# Altium PCB Slave.PcbDoc (part 2 of 2)
Units mm, origin at the board's own origin, x right, y up, seen from the top; angles counter-clockwise.
Board outline 380 x 63 mm, 4 copper layers (Top Copper, Signal Layer 1, Signal Layer 2, Bottom Copper), stack 1.57 mm thick; 247 components, 208 nets, 792 pads, 0 vias.
Unrouted connection lines stored in the file: 502.
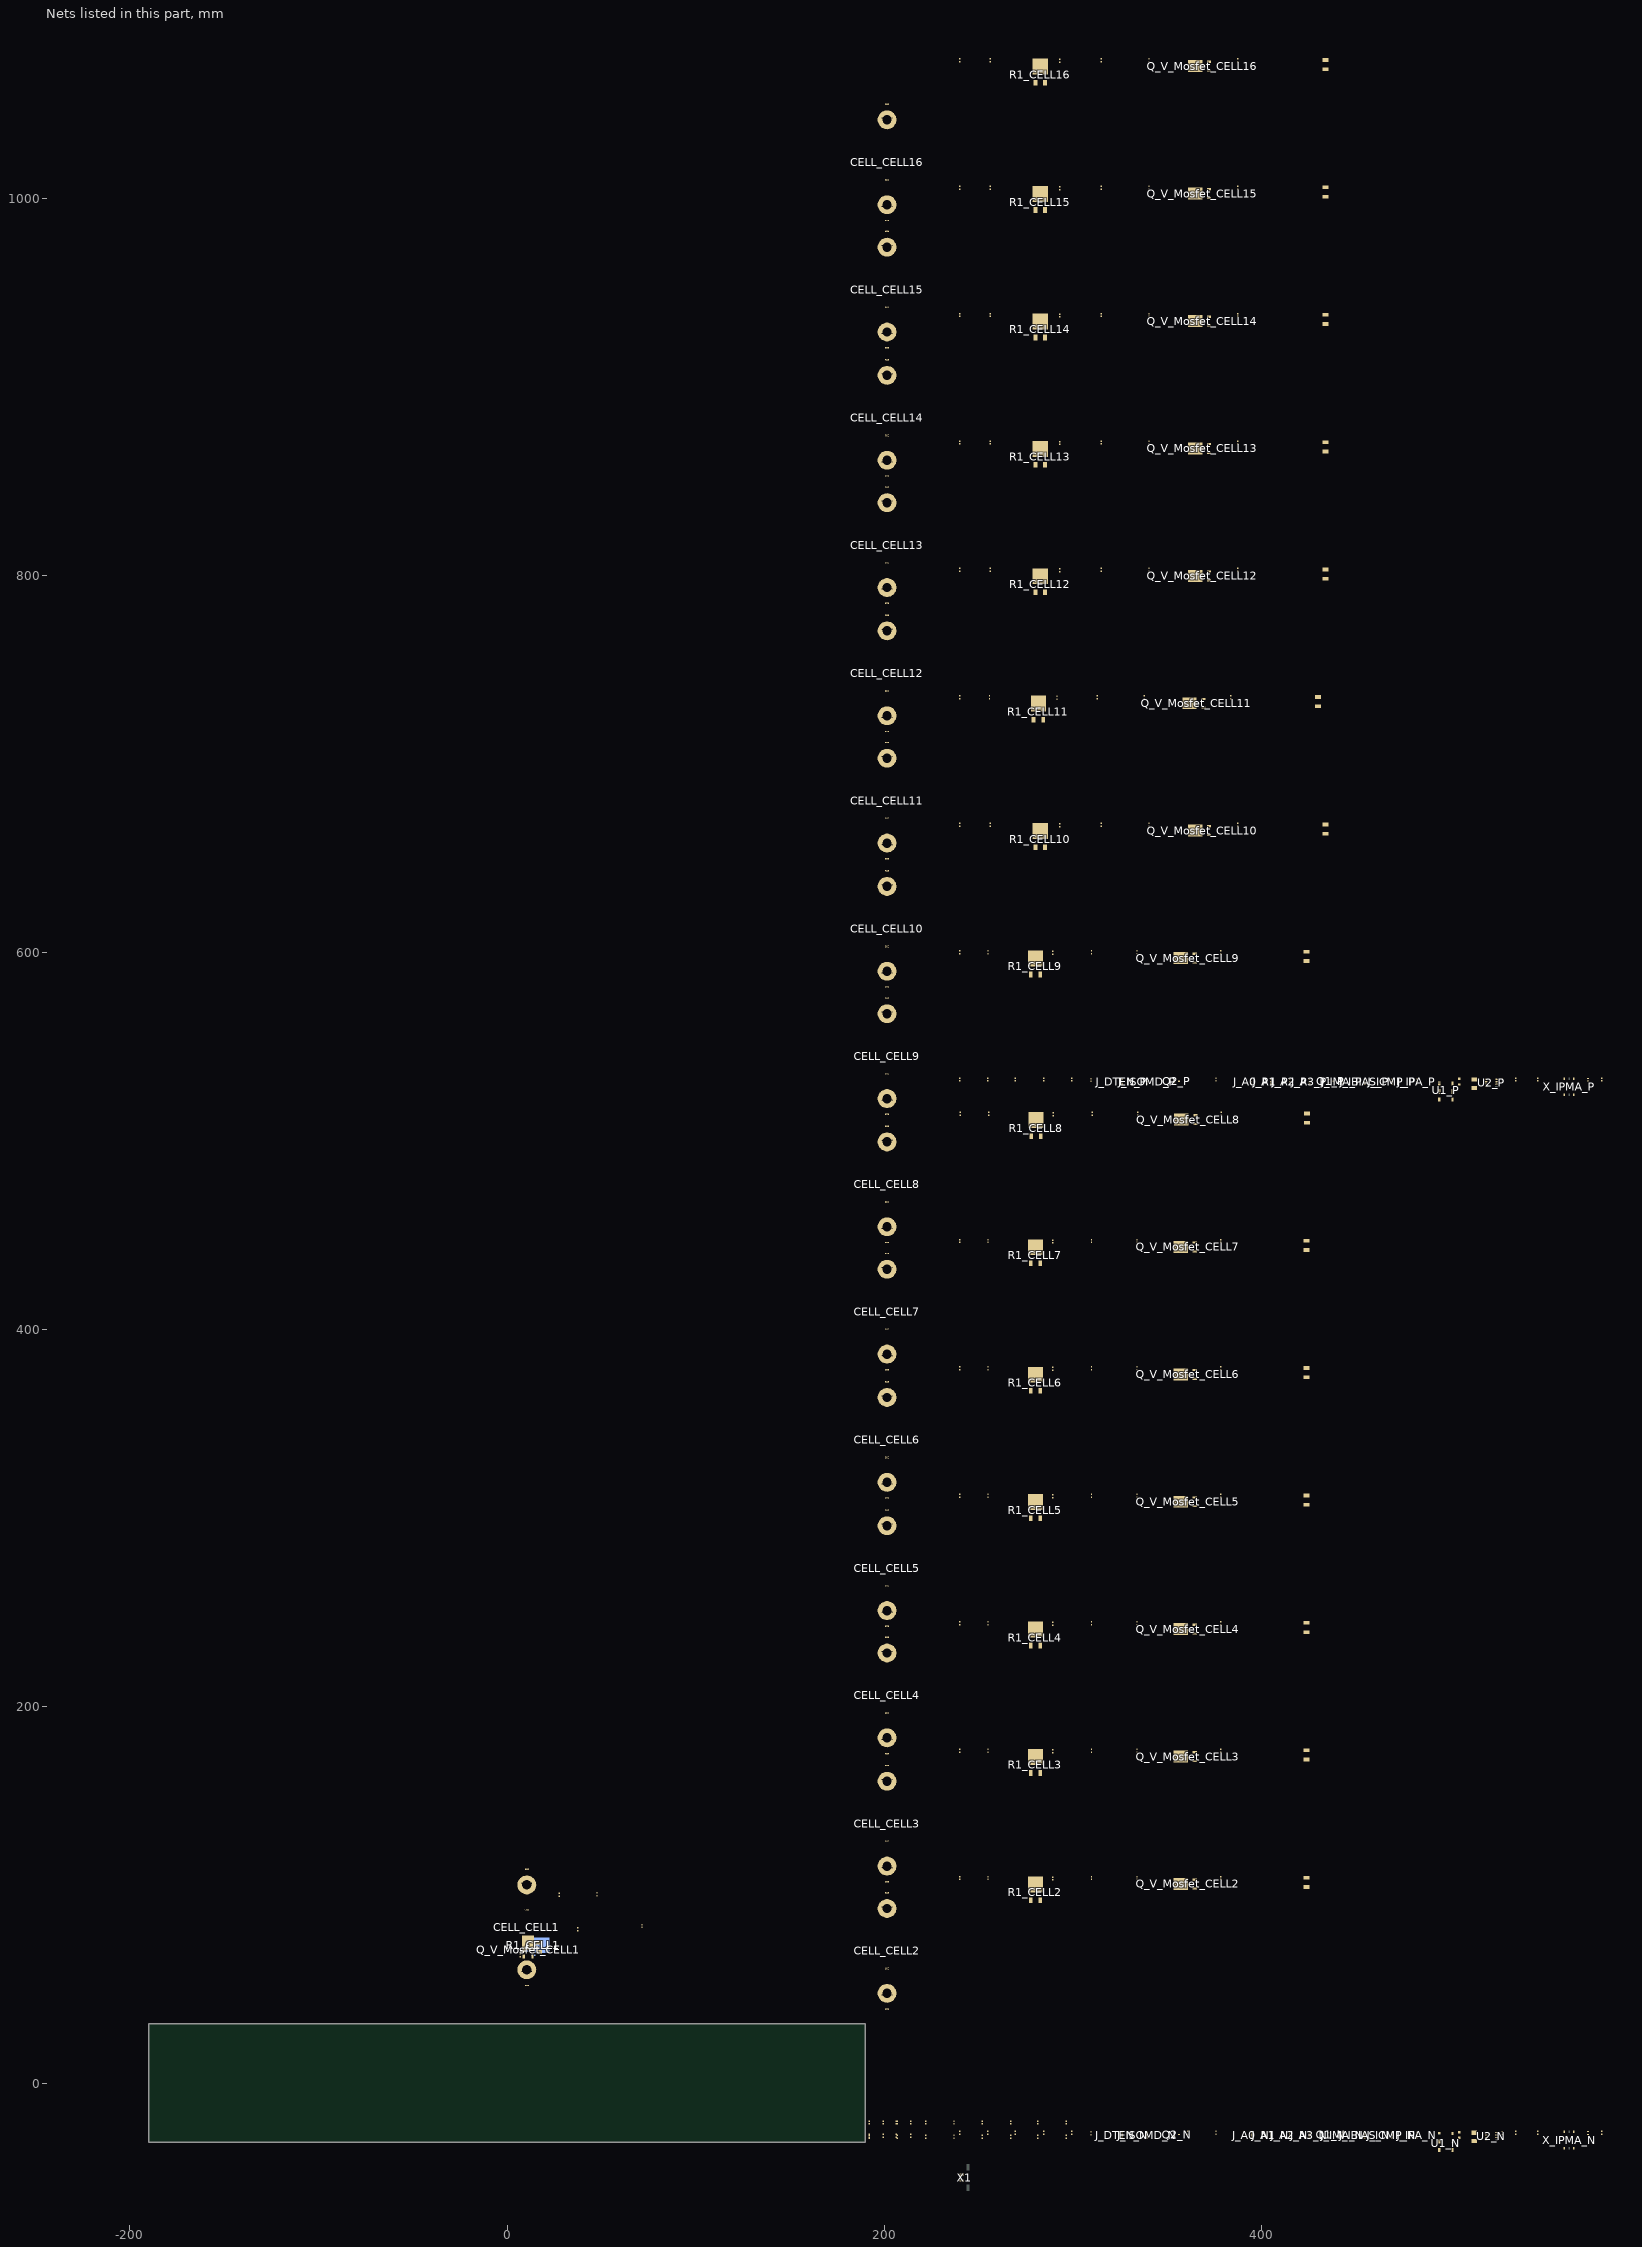
[diagram p2: the nets of this part, all layers, seen from the top]

## Part data
C_IPMA_N C_IPMA_P C_Temp1_N C_Temp1_P C_Temp2_N C_Temp2_P C_Temp3_N C_Temp3_P C_Temp4_N C_Temp4_P C_V1_N C_V1_P C_V_CELL1 C_V_CELL2 C_V_CELL3 C_V_CELL4 C_V_CELL5 C_V_CELL6 C_V_CELL7 C_V_CELL8 C_V_CELL9 C_V_CELL10 C_V_CELL11 C_V_CELL12 C_V_CELL13 C_V_CELL14 C_V_CELL15 C_V_CELL16 C_VREF1_N C_VREF1_P C_VREF2_N C_VREF2_P C_VREG1_N C_VREG1_P C_VREG2_N C_VREG2_P: library part CAP-0603, "CAP-0603"
CELL_CELL1 CELL_CELL2 CELL_CELL3 CELL_CELL4 CELL_CELL5 CELL_CELL6 CELL_CELL7 CELL_CELL8 CELL_CELL9 CELL_CELL10 CELL_CELL11 CELL_CELL12 CELL_CELL13 CELL_CELL14 CELL_CELL15 CELL_CELL16: library part Li1x7pVTC6T_Clip
D2_N D2_P: library part DIODE-SMB
F_V_CELL1 F_V_CELL2 F_V_CELL3 F_V_CELL4 F_V_CELL5 F_V_CELL6 F_V_CELL7 F_V_CELL8 F_V_CELL9 F_V_CELL10 F_V_CELL11 F_V_CELL12 F_V_CELL13 F_V_CELL14 F_V_CELL15 F_V_CELL16: library part 0679L, "0679L"
J_A0_N J_A0_P J_A1_N J_A1_P J_A2_N J_A2_P J_A3_N J_A3_P J_DTEN_N J_DTEN_P J_IBIAS_N J_IBIAS_P J_ICMP_N J_ICMP_P J_IMA_N J_IMA_P J_IPA_N J_IPA_P J_ISOMD_N J_ISOMD_P: library part "DPDT Solder"
LED_DEBUG_N LED_DEBUG_P LED_V_D_CELL1 LED_V_D_CELL2 LED_V_D_CELL3 LED_V_D_CELL4 LED_V_D_CELL5 LED_V_D_CELL6 LED_V_D_CELL7 LED_V_D_CELL8 LED_V_D_CELL9 LED_V_D_CELL10 LED_V_D_CELL11 LED_V_D_CELL12 LED_V_D_CELL13 LED_V_D_CELL14 LED_V_D_CELL15 LED_V_D_CELL16: library part LED-0603, "LED-0603"
NTC_Gate_CELL1 NTC_Gate_CELL2 NTC_Gate_CELL3 NTC_Gate_CELL4 NTC_Gate_CELL5 NTC_Gate_CELL6 NTC_Gate_CELL7 NTC_Gate_CELL8 NTC_Gate_CELL9 NTC_Gate_CELL10 NTC_Gate_CELL11 NTC_Gate_CELL12 NTC_Gate_CELL13 NTC_Gate_CELL14 NTC_Gate_CELL15 NTC_Gate_CELL16: library part NTC-0603, "NTC-0603"
Q_V_Mosfet_CELL1 Q_V_Mosfet_CELL2 Q_V_Mosfet_CELL3 Q_V_Mosfet_CELL4 Q_V_Mosfet_CELL5 Q_V_Mosfet_CELL6 Q_V_Mosfet_CELL7 Q_V_Mosfet_CELL8 Q_V_Mosfet_CELL9 Q_V_Mosfet_CELL10 Q_V_Mosfet_CELL11 Q_V_Mosfet_CELL12 Q_V_Mosfet_CELL13 Q_V_Mosfet_CELL14 Q_V_Mosfet_CELL15 Q_V_Mosfet_CELL16: library part DMP10H400SK3-13, "DMP10H400SK3-13", Package=TO252, DeviceSetName=DMP10H400SK3-13, GateName_1=G$1, LibraryName=IFE_Transistors, SymbolName_1=LABELED-PMOS
R1_CELL1 R1_CELL2 R1_CELL3 R1_CELL4 R1_CELL5 R1_CELL6 R1_CELL7 R1_CELL8 R1_CELL9 R1_CELL10 R1_CELL11 R1_CELL12 R1_CELL13 R1_CELL14 R1_CELL15 R1_CELL16: library part RES_TO252, "RES SMD TO252", Package=TO252, Company=IFE, Part=RES_TO252
R2_N R2_P R3_N R3_P: library part RES_0603, "RES SMD 0603", Package=0603, Company=IFE, Part=RES_0603
R4_N R4_P R5_N R5_P R6_N R6_P R7_N R7_P R_DEBUG_N R_DEBUG_P R_Gate_CELL1 R_Gate_CELL2 R_Gate_CELL3 R_Gate_CELL4 R_Gate_CELL5 R_Gate_CELL6 R_Gate_CELL7 R_Gate_CELL8 R_Gate_CELL9 R_Gate_CELL10 R_Gate_CELL11 R_Gate_CELL12 R_Gate_CELL13 R_Gate_CELL14 R_Gate_CELL15 R_Gate_CELL16 R_IMA_N R_IMA_P R_Input1_N R_Input1_P R_Input_CELL1 R_Input_CELL2 R_Input_CELL3 R_Input_CELL4 R_Input_CELL5 R_Input_CELL6 R_Input_CELL7 R_Input_CELL8 R_Input_CELL9 R_Input_CELL10 R_Input_CELL11 R_Input_CELL12 R_Input_CELL13 R_Input_CELL14 R_Input_CELL15 R_Input_CELL16 R_IPA_N R_IPA_P R_Temp1_N R_Temp1_P R_Temp2_N R_Temp2_P R_Temp3_N R_Temp3_P R_Temp4_N R_Temp4_P R_V_D_LED_CELL1 R_V_D_LED_CELL2 R_V_D_LED_CELL3 R_V_D_LED_CELL4 R_V_D_LED_CELL5 R_V_D_LED_CELL6 R_V_D_LED_CELL7 R_V_D_LED_CELL8 R_V_D_LED_CELL9 R_V_D_LED_CELL10 R_V_D_LED_CELL11 R_V_D_LED_CELL12 R_V_D_LED_CELL13 R_V_D_LED_CELL14 R_V_D_LED_CELL15 R_V_D_LED_CELL16 R_VREGPU_N R_VREGPU_P: library part RES-0603
X1: library part POS2_MF43650-0224, Package=43650-0224, DeviceName=43650-0224, DeviceSetName=HEADER_POS2_?, GateName_1=G$1, LibraryName="MOLEX Micro-Fit", SymbolName_1=HEADER_POS2

## Nets (pads, with @x,y where several pads share a name; then routed paths per layer and width w, separated by ;. In a path a pad name is that pad's centre, name@x,y a point inside that pad or via, vN(x,y) a via of type N, cw(c..) or ccw(c..) an arc to the next point about the centre after c; other vN are vias at no path point)
CSB_N: J_IMA_N.1
CSB_P: J_IMA_P.1
DRIVE_N: Q1_N.1 U1_N.38
DRIVE_P: Q1_P.1 U1_P.38
F_CELL1: C_V_CELL1.2 F_V_CELL1.1 NTC_Gate_CELL1.2 Q_V_Mosfet_CELL1.3 R1_CELL1.3 R_Input_CELL1.1
F_CELL2: C_V_CELL2.2 F_V_CELL2.1 NTC_Gate_CELL2.2 Q_V_Mosfet_CELL2.3 R1_CELL2.3 R_Input_CELL2.1
F_CELL3: C_V_CELL3.2 F_V_CELL3.1 NTC_Gate_CELL3.2 Q_V_Mosfet_CELL3.3 R1_CELL3.3 R_Input_CELL3.1
F_CELL4: C_V_CELL4.2 F_V_CELL4.1 NTC_Gate_CELL4.2 Q_V_Mosfet_CELL4.3 R1_CELL4.3 R_Input_CELL4.1
F_CELL5: C_V_CELL5.2 F_V_CELL5.1 NTC_Gate_CELL5.2 Q_V_Mosfet_CELL5.3 R1_CELL5.3 R_Input_CELL5.1
F_CELL6: C_V_CELL6.2 F_V_CELL6.1 NTC_Gate_CELL6.2 Q_V_Mosfet_CELL6.3 R1_CELL6.3 R_Input_CELL6.1
F_CELL7: C_V_CELL7.2 F_V_CELL7.1 NTC_Gate_CELL7.2 Q_V_Mosfet_CELL7.3 R1_CELL7.3 R_Input_CELL7.1
F_CELL8: C_V_CELL8.2 F_V_CELL8.1 NTC_Gate_CELL8.2 Q_V_Mosfet_CELL8.3 R1_CELL8.3 R_Input_CELL8.1
F_CELL9: C_V_CELL9.2 F_V_CELL9.1 NTC_Gate_CELL9.2 Q_V_Mosfet_CELL9.3 R1_CELL9.3 R_Input_CELL9.1
F_CELL10: C_V_CELL10.2 F_V_CELL10.1 NTC_Gate_CELL10.2 Q_V_Mosfet_CELL10.3 R1_CELL10.3 R_Input_CELL10.1
F_CELL11: C_V_CELL11.2 F_V_CELL11.1 NTC_Gate_CELL11.2 Q_V_Mosfet_CELL11.3 R1_CELL11.3 R_Input_CELL11.1
F_CELL12: C_V_CELL12.2 F_V_CELL12.1 NTC_Gate_CELL12.2 Q_V_Mosfet_CELL12.3 R1_CELL12.3 R_Input_CELL12.1
F_CELL13: C_V_CELL13.2 F_V_CELL13.1 NTC_Gate_CELL13.2 Q_V_Mosfet_CELL13.3 R1_CELL13.3 R_Input_CELL13.1
F_CELL14: C_V_CELL14.2 F_V_CELL14.1 NTC_Gate_CELL14.2 Q_V_Mosfet_CELL14.3 R1_CELL14.3 R_Input_CELL14.1
F_CELL15: C_V_CELL15.2 F_V_CELL15.1 NTC_Gate_CELL15.2 Q_V_Mosfet_CELL15.3 R1_CELL15.3 R_Input_CELL15.1
F_CELL16: C_V_CELL16.2 F_V_CELL16.1 NTC_Gate_CELL16.2 Q_V_Mosfet_CELL16.3 R1_CELL16.3 R_Input_CELL16.1
GPIO1_N: R_Temp1_N.2 U1_N.27
GPIO1_P: R_Temp1_P.2 U1_P.27
GPIO2_N: R_Temp2_N.2 U1_N.28
GPIO2_P: R_Temp2_P.2 U1_P.28
GPIO3_N: R_Temp3_N.2 U1_N.29
GPIO3_P: R_Temp3_P.2 U1_P.29
GPIO4_N: R_Temp4_N.2 U1_N.32
GPIO4_P: R_Temp4_P.2 U1_P.32
IBIAS_N: J_IBIAS_N.2 R2_N.2
IBIAS_P: J_IBIAS_P.2 R2_P.2
ICMP_N: J_ICMP_N.2 R2_N.1 R3_N.2
ICMP_P: J_ICMP_P.2 R2_P.1 R3_P.2
IMA_N: J_IMA_N.2 R_IMA_N.2 X_IPMA_N.4
IMA_P: J_IMA_P.2 R_IMA_P.2 X_IPMA_P.4
IPA_N: J_IPA_N.2 R_IPA_N.2 X_IPMA_N.6
IPA_P: J_IPA_P.2 R_IPA_P.2 X_IPMA_P.6
NEG1_C1: C_V_CELL1.1 C_V_CELL2.1 C_V_CELL3.1 C_V_CELL4.1 C_V_CELL5.1 C_V_CELL6.1 C_V_CELL7.1 C_V_CELL8.1 CELL_CELL1.- CELL_CELL1.-L CELL_CELL1.-O CELL_CELL1.-R CELL_CELL1.T- CELL_CELL2.T- CELL_CELL3.T- CELL_CELL4.T- CELL_CELL5.T- CELL_CELL6.T- CELL_CELL7.T- CELL_CELL8.T- LED_V_D_CELL1.K R1_CELL1.1
NEG1_C2: C_V_CELL9.1 C_V_CELL10.1 C_V_CELL11.1 C_V_CELL12.1 C_V_CELL13.1 C_V_CELL14.1 C_V_CELL15.1 C_V_CELL16.1 CELL_CELL9.- CELL_CELL9.-L CELL_CELL9.-O CELL_CELL9.-R CELL_CELL9.T- CELL_CELL10.T- CELL_CELL11.T- CELL_CELL12.T- CELL_CELL13.T- CELL_CELL14.T- CELL_CELL15.T- CELL_CELL16.T- LED_V_D_CELL9.K R1_CELL9.1
NEG1_N: C1_N.2 C_IPMA_N.1 C_Temp1_N.1 C_Temp2_N.1 C_Temp3_N.1 C_Temp4_N.1 C_V1_N.1 C_VREF1_N.1 C_VREF1_P.1 C_VREF2_N.1 C_VREF2_P.1 C_VREG1_N.1 C_VREG1_P.1 C_VREG2_N.1 C_VREG2_P.1 J_A0_N.1 J_A1_N.1 J_A2_N.1 J_A3_N.1 J_DTEN_N.1 J_ISOMD_N.1 Q1_N.2 Q2_N.2 R3_N.1 R_Input1_N.2 U1_N.30 U1_N.31 U2_N.4
NEG1_P: C1_P.2 C_IPMA_P.1 C_Temp1_P.1 C_Temp2_P.1 C_Temp3_P.1 C_Temp4_P.1 C_V1_P.1 CELL_CELL8.+ CELL_CELL8.+L CELL_CELL8.+O CELL_CELL8.+R D2_N.K F_V_CELL8.2 J_A0_P.1 J_A1_P.1 J_A2_P.1 J_A3_P.1 J_DTEN_P.1 J_ISOMD_P.1 Q1_P.2 Q2_P.2 R3_P.1 R_Input1_P.2 U1_N.1 U1_P.30 U1_P.31 U2_P.4
NEG2_C1: CELL_CELL1.+ CELL_CELL1.+L CELL_CELL1.+O CELL_CELL1.+R CELL_CELL2.- CELL_CELL2.-L CELL_CELL2.-O CELL_CELL2.-R F_V_CELL1.2 LED_V_D_CELL2.K R1_CELL2.1
NEG2_C2: CELL_CELL9.+ CELL_CELL9.+L CELL_CELL9.+O CELL_CELL9.+R CELL_CELL10.- CELL_CELL10.-L CELL_CELL10.-O CELL_CELL10.-R F_V_CELL9.2 LED_V_D_CELL10.K R1_CELL10.1
NEG3_C1: CELL_CELL2.+ CELL_CELL2.+L CELL_CELL2.+O CELL_CELL2.+R CELL_CELL3.- CELL_CELL3.-L CELL_CELL3.-O CELL_CELL3.-R F_V_CELL2.2 LED_V_D_CELL3.K R1_CELL3.1
NEG3_C2: CELL_CELL10.+ CELL_CELL10.+L CELL_CELL10.+O CELL_CELL10.+R CELL_CELL11.- CELL_CELL11.-L CELL_CELL11.-O CELL_CELL11.-R F_V_CELL10.2 LED_V_D_CELL11.K R1_CELL11.1
NEG4_C1: CELL_CELL3.+ CELL_CELL3.+L CELL_CELL3.+O CELL_CELL3.+R CELL_CELL4.- CELL_CELL4.-L CELL_CELL4.-O CELL_CELL4.-R F_V_CELL3.2 LED_V_D_CELL4.K R1_CELL4.1
NEG4_C2: CELL_CELL11.+ CELL_CELL11.+L CELL_CELL11.+O CELL_CELL11.+R CELL_CELL12.- CELL_CELL12.-L CELL_CELL12.-O CELL_CELL12.-R F_V_CELL11.2 LED_V_D_CELL12.K R1_CELL12.1
NEG5_C1: CELL_CELL4.+ CELL_CELL4.+L CELL_CELL4.+O CELL_CELL4.+R CELL_CELL5.- CELL_CELL5.-L CELL_CELL5.-O CELL_CELL5.-R F_V_CELL4.2 LED_V_D_CELL5.K R1_CELL5.1
NEG5_C2: CELL_CELL12.+ CELL_CELL12.+L CELL_CELL12.+O CELL_CELL12.+R CELL_CELL13.- CELL_CELL13.-L CELL_CELL13.-O CELL_CELL13.-R F_V_CELL12.2 LED_V_D_CELL13.K R1_CELL13.1
NEG6_C1: CELL_CELL5.+ CELL_CELL5.+L CELL_CELL5.+O CELL_CELL5.+R CELL_CELL6.- CELL_CELL6.-L CELL_CELL6.-O CELL_CELL6.-R F_V_CELL5.2 LED_V_D_CELL6.K R1_CELL6.1
NEG6_C2: CELL_CELL13.+ CELL_CELL13.+L CELL_CELL13.+O CELL_CELL13.+R CELL_CELL14.- CELL_CELL14.-L CELL_CELL14.-O CELL_CELL14.-R F_V_CELL13.2 LED_V_D_CELL14.K R1_CELL14.1
NEG7_C1: CELL_CELL6.+ CELL_CELL6.+L CELL_CELL6.+O CELL_CELL6.+R CELL_CELL7.- CELL_CELL7.-L CELL_CELL7.-O CELL_CELL7.-R F_V_CELL6.2 LED_V_D_CELL7.K R1_CELL7.1
NEG7_C2: CELL_CELL14.+ CELL_CELL14.+L CELL_CELL14.+O CELL_CELL14.+R CELL_CELL15.- CELL_CELL15.-L CELL_CELL15.-O CELL_CELL15.-R F_V_CELL14.2 LED_V_D_CELL15.K R1_CELL15.1
NEG8_C1: CELL_CELL7.+ CELL_CELL7.+L CELL_CELL7.+O CELL_CELL7.+R CELL_CELL8.- CELL_CELL8.-L CELL_CELL8.-O CELL_CELL8.-R F_V_CELL7.2 LED_V_D_CELL8.K R1_CELL8.1
NEG8_C2: CELL_CELL15.+ CELL_CELL15.+L CELL_CELL15.+O CELL_CELL15.+R CELL_CELL16.- CELL_CELL16.-L CELL_CELL16.-O CELL_CELL16.-R F_V_CELL15.2 LED_V_D_CELL16.K R1_CELL16.1
NetC1_N_1: C1_N.1 D2_N.A R_VREGPU_N.2 U2_N.8
NetC1_P_1: C1_P.1 D2_P.A R_VREGPU_P.2 U2_P.8
NetC_IPMA_N_2: C_IPMA_N.2 R_IMA_N.1 R_IPA_N.1
NetC_IPMA_P_2: C_IPMA_P.2 R_IMA_P.1 R_IPA_P.1
NetC_V1_N_2: C_V1_N.2 R_Input1_N.1 U1_N.26
NetC_V1_P_2: C_V1_P.2 R_Input1_P.1 U1_P.26
NetJ_A0_N_3: J_A0_N.3 U1_N.45
NetJ_A0_P_3: J_A0_P.3 U1_P.45
NetJ_A1_N_3: J_A1_N.3 U1_N.46
NetJ_A1_P_3: J_A1_P.3 U1_P.46
NetJ_A2_N_3: J_A2_N.3 U1_N.47
NetJ_A2_P_3: J_A2_P.3 U1_P.47
NetJ_A3_N_3: J_A3_N.3 U1_N.48
NetJ_A3_P_3: J_A3_P.3 U1_P.48
NetJ_DTEN_N_3: J_DTEN_N.3 U1_N.36
NetJ_DTEN_P_3: J_DTEN_P.3 U1_P.36
NetJ_IBIAS_N_3: J_IBIAS_N.3 U1_N.44
NetJ_IBIAS_P_3: J_IBIAS_P.3 U1_P.44
NetJ_ICMP_N_3: J_ICMP_N.3 U1_N.43
NetJ_ICMP_P_3: J_ICMP_P.3 U1_P.43
NetJ_IMA_N_3: J_IMA_N.3 U1_N.41
NetJ_IMA_P_3: J_IMA_P.3 U1_P.41
NetJ_IPA_N_3: J_IPA_N.3 U1_N.42
NetJ_IPA_P_3: J_IPA_P.3 U1_P.42
NetJ_ISOMD_N_3: J_ISOMD_N.3 U1_N.40
NetJ_ISOMD_P_3: J_ISOMD_P.3 U1_P.40
NetLED_DEBUG_N_K: LED_DEBUG_N.K R_DEBUG_N.2
NetLED_DEBUG_P_K: LED_DEBUG_P.K R_DEBUG_P.2
NetLED_V_D_CELL1_A: LED_V_D_CELL1.A R_V_D_LED_CELL1.2
NetLED_V_D_CELL2_A: LED_V_D_CELL2.A R_V_D_LED_CELL2.2
NetLED_V_D_CELL3_A: LED_V_D_CELL3.A R_V_D_LED_CELL3.2
NetLED_V_D_CELL4_A: LED_V_D_CELL4.A R_V_D_LED_CELL4.2
NetLED_V_D_CELL5_A: LED_V_D_CELL5.A R_V_D_LED_CELL5.2
NetLED_V_D_CELL6_A: LED_V_D_CELL6.A R_V_D_LED_CELL6.2
NetLED_V_D_CELL7_A: LED_V_D_CELL7.A R_V_D_LED_CELL7.2
NetLED_V_D_CELL8_A: LED_V_D_CELL8.A R_V_D_LED_CELL8.2
NetLED_V_D_CELL9_A: LED_V_D_CELL9.A R_V_D_LED_CELL9.2
NetLED_V_D_CELL10_A: LED_V_D_CELL10.A R_V_D_LED_CELL10.2
NetLED_V_D_CELL11_A: LED_V_D_CELL11.A R_V_D_LED_CELL11.2
NetLED_V_D_CELL12_A: LED_V_D_CELL12.A R_V_D_LED_CELL12.2
NetLED_V_D_CELL13_A: LED_V_D_CELL13.A R_V_D_LED_CELL13.2
NetLED_V_D_CELL14_A: LED_V_D_CELL14.A R_V_D_LED_CELL14.2
NetLED_V_D_CELL15_A: LED_V_D_CELL15.A R_V_D_LED_CELL15.2
NetLED_V_D_CELL16_A: LED_V_D_CELL16.A R_V_D_LED_CELL16.2
NetNTC_Gate_CELL1_1: NTC_Gate_CELL1.1 Q_V_Mosfet_CELL1.1 R_Gate_CELL1.1
NetNTC_Gate_CELL2_1: NTC_Gate_CELL2.1 Q_V_Mosfet_CELL2.1 R_Gate_CELL2.1
NetNTC_Gate_CELL3_1: NTC_Gate_CELL3.1 Q_V_Mosfet_CELL3.1 R_Gate_CELL3.1
NetNTC_Gate_CELL4_1: NTC_Gate_CELL4.1 Q_V_Mosfet_CELL4.1 R_Gate_CELL4.1
NetNTC_Gate_CELL5_1: NTC_Gate_CELL5.1 Q_V_Mosfet_CELL5.1 R_Gate_CELL5.1
NetNTC_Gate_CELL6_1: NTC_Gate_CELL6.1 Q_V_Mosfet_CELL6.1 R_Gate_CELL6.1
NetNTC_Gate_CELL7_1: NTC_Gate_CELL7.1 Q_V_Mosfet_CELL7.1 R_Gate_CELL7.1
NetNTC_Gate_CELL8_1: NTC_Gate_CELL8.1 Q_V_Mosfet_CELL8.1 R_Gate_CELL8.1
NetNTC_Gate_CELL9_1: NTC_Gate_CELL9.1 Q_V_Mosfet_CELL9.1 R_Gate_CELL9.1
NetNTC_Gate_CELL10_1: NTC_Gate_CELL10.1 Q_V_Mosfet_CELL10.1 R_Gate_CELL10.1
NetNTC_Gate_CELL11_1: NTC_Gate_CELL11.1 Q_V_Mosfet_CELL11.1 R_Gate_CELL11.1
NetNTC_Gate_CELL12_1: NTC_Gate_CELL12.1 Q_V_Mosfet_CELL12.1 R_Gate_CELL12.1
NetNTC_Gate_CELL13_1: NTC_Gate_CELL13.1 Q_V_Mosfet_CELL13.1 R_Gate_CELL13.1
NetNTC_Gate_CELL14_1: NTC_Gate_CELL14.1 Q_V_Mosfet_CELL14.1 R_Gate_CELL14.1
NetNTC_Gate_CELL15_1: NTC_Gate_CELL15.1 Q_V_Mosfet_CELL15.1 R_Gate_CELL15.1
NetNTC_Gate_CELL16_1: NTC_Gate_CELL16.1 Q_V_Mosfet_CELL16.1 R_Gate_CELL16.1
NetQ1_N_3: Q1_N.3 R_VREGPU_N.1 U2_N.3
NetQ1_P_3: Q1_P.3 R_VREGPU_P.1 U2_P.3
NetQ2_N_1: Q2_N.1 U1_N.33
NetQ2_N_3: Q2_N.3 R_DEBUG_N.1
NetQ2_P_1: Q2_P.1 U1_P.33
NetQ2_P_3: Q2_P.3 R_DEBUG_P.1
NetQ_V_Mosfet_CELL1_2: Q_V_Mosfet_CELL1.2 R1_CELL1.2 R_V_D_LED_CELL1.1
NetQ_V_Mosfet_CELL2_2: Q_V_Mosfet_CELL2.2 R1_CELL2.2 R_V_D_LED_CELL2.1
NetQ_V_Mosfet_CELL3_2: Q_V_Mosfet_CELL3.2 R1_CELL3.2 R_V_D_LED_CELL3.1
NetQ_V_Mosfet_CELL4_2: Q_V_Mosfet_CELL4.2 R1_CELL4.2 R_V_D_LED_CELL4.1
NetQ_V_Mosfet_CELL5_2: Q_V_Mosfet_CELL5.2 R1_CELL5.2 R_V_D_LED_CELL5.1
NetQ_V_Mosfet_CELL6_2: Q_V_Mosfet_CELL6.2 R1_CELL6.2 R_V_D_LED_CELL6.1
NetQ_V_Mosfet_CELL7_2: Q_V_Mosfet_CELL7.2 R1_CELL7.2 R_V_D_LED_CELL7.1
NetQ_V_Mosfet_CELL8_2: Q_V_Mosfet_CELL8.2 R1_CELL8.2 R_V_D_LED_CELL8.1
NetQ_V_Mosfet_CELL9_2: Q_V_Mosfet_CELL9.2 R1_CELL9.2 R_V_D_LED_CELL9.1
NetQ_V_Mosfet_CELL10_2: Q_V_Mosfet_CELL10.2 R1_CELL10.2 R_V_D_LED_CELL10.1
NetQ_V_Mosfet_CELL11_2: Q_V_Mosfet_CELL11.2 R1_CELL11.2 R_V_D_LED_CELL11.1
NetQ_V_Mosfet_CELL12_2: Q_V_Mosfet_CELL12.2 R1_CELL12.2 R_V_D_LED_CELL12.1
NetQ_V_Mosfet_CELL13_2: Q_V_Mosfet_CELL13.2 R1_CELL13.2 R_V_D_LED_CELL13.1
NetQ_V_Mosfet_CELL14_2: Q_V_Mosfet_CELL14.2 R1_CELL14.2 R_V_D_LED_CELL14.1
NetQ_V_Mosfet_CELL15_2: Q_V_Mosfet_CELL15.2 R1_CELL15.2 R_V_D_LED_CELL15.1
NetQ_V_Mosfet_CELL16_2: Q_V_Mosfet_CELL16.2 R1_CELL16.2 R_V_D_LED_CELL16.1
NetU2_N_6: U2_N.6 U2_N.7
NetU2_P_6: U2_P.6 U2_P.7
NetX1_P$1: X1.P$1 X_IPMA_N.3 X_IPMA_P.3
NetX1_P$2: X1.P$2 X_IPMA_N.1 X_IPMA_P.1
POS8_C2: CELL_CELL16.+ CELL_CELL16.+L CELL_CELL16.+O CELL_CELL16.+R D2_P.K F_V_CELL16.2 U1_P.1
S1_C1: R_Gate_CELL1.2 U1_N.25
S1_C2: R_Gate_CELL9.2 U1_P.25
S2_C1: R_Gate_CELL2.2 U1_N.23
S2_C2: R_Gate_CELL10.2 U1_P.23
S3_C1: R_Gate_CELL3.2 U1_N.21
S3_C2: R_Gate_CELL11.2 U1_P.21
S4_C1: R_Gate_CELL4.2 U1_N.19
S4_C2: R_Gate_CELL12.2 U1_P.19
S5_C1: R_Gate_CELL5.2 U1_N.13
S5_C2: R_Gate_CELL13.2 U1_P.13
S6_C1: R_Gate_CELL6.2 U1_N.11
S6_C2: R_Gate_CELL14.2 U1_P.11
S7_C1: R_Gate_CELL7.2 U1_N.9
S7_C2: R_Gate_CELL15.2 U1_P.9
S8_C1: R_Gate_CELL8.2 U1_N.7
S8_C2: R_Gate_CELL16.2 U1_P.7
SCK_N: J_IPA_N.1
SCK_P: J_IPA_P.1
SDI_N: J_ICMP_N.1
SDI_P: J_ICMP_P.1
SDO_N: J_IBIAS_N.1
SDO_P: J_IBIAS_P.1
T1_C1: CELL_CELL1.T+
T1_C2: CELL_CELL9.T+
T1_N: C_Temp1_N.2 R7_N.1 R_Temp1_N.1
T1_P: C_Temp1_P.2 R7_P.1 R_Temp1_P.1
T2_C1: CELL_CELL2.T+
T2_C2: CELL_CELL10.T+
T3_C1: CELL_CELL3.T+
T3_C2: CELL_CELL11.T+
T3_N: C_Temp2_N.2 R6_N.1 R_Temp2_N.1
T3_P: C_Temp2_P.2 R6_P.1 R_Temp2_P.1
T4_C1: CELL_CELL4.T+
T4_C2: CELL_CELL12.T+
T5_C1: CELL_CELL5.T+
T5_C2: CELL_CELL13.T+
T5_N: C_Temp3_N.2 R5_N.1 R_Temp3_N.1
T5_P: C_Temp3_P.2 R5_P.1 R_Temp3_P.1
T6_C1: CELL_CELL6.T+
T6_C2: CELL_CELL14.T+
T7_C1: CELL_CELL7.T+
T7_C2: CELL_CELL15.T+
T7_N: C_Temp4_N.2 R4_N.1 R_Temp4_N.1
T7_P: C_Temp4_P.2 R4_P.1 R_Temp4_P.1
T8_C1: CELL_CELL8.T+
T8_C2: CELL_CELL16.T+
V1_C1: R_Input_CELL1.2 U1_N.24
V1_C2: R_Input_CELL9.2 U1_P.24
V2_C1: R_Input_CELL2.2 U1_N.22
V2_C2: R_Input_CELL10.2 U1_P.22
V3_C1: R_Input_CELL3.2 U1_N.20
V3_C2: R_Input_CELL11.2 U1_P.20
V4_C1: R_Input_CELL4.2 U1_N.14 U1_N.16 U1_N.18
V4_C2: R_Input_CELL12.2 U1_P.14 U1_P.16 U1_P.18
V5_C1: R_Input_CELL5.2 U1_N.12
V5_C2: R_Input_CELL13.2 U1_P.12
V6_C1: R_Input_CELL6.2 U1_N.10
V6_C2: R_Input_CELL14.2 U1_P.10
V7_C1: R_Input_CELL7.2 U1_N.8
V7_C2: R_Input_CELL15.2 U1_P.8
V8_C1: R_Input_CELL8.2 U1_N.2 U1_N.4 U1_N.6
V8_C2: R_Input_CELL16.2 U1_P.2 U1_P.4 U1_P.6
VREF1_N: C_VREF1_N.2 U1_N.35
VREF1_P: C_VREF1_P.2 U1_P.35
VREF2_N: C_VREF2_N.2 U1_N.34
VREF2_P: C_VREF2_P.2 U1_P.34
VREG_N: C_VREG1_N.2 C_VREG1_P.2 C_VREG2_N.2 C_VREG2_P.2 J_A0_N.2 J_A0_P.2 J_A1_N.2 J_A1_P.2 J_A2_N.2 J_A2_P.2 J_A3_N.2 J_A3_P.2 J_DTEN_N.2 J_DTEN_P.2 J_ISOMD_N.2 J_ISOMD_P.2 LED_DEBUG_N.A LED_DEBUG_P.A R4_N.2 R4_P.2 R5_N.2 R5_P.2 R6_N.2 R6_P.2 R7_N.2 R7_P.2 U1_N.37 U1_P.37 U2_N.1 U2_N.2 U2_P.1 U2_P.2
pads on no net: U1_N.3 U1_N.5 U1_N.15 U1_N.17 U1_N.39 U1_P.3 U1_P.5 U1_P.15 U1_P.17 U1_P.39 U2_N.5 U2_P.5 X1.TAB1 X1.TAB2 X_IPMA_N.2 X_IPMA_N.5 X_IPMA_P.2 X_IPMA_P.5

## Keep-outs
Keep-Out Layer:
  lines w0.15: -193,180.5 -227,180.5 -227,243.65 157.85,243.65 157.85,180.5 140.7,180.5 140.7,197.325 134.35,197.325 134.35,180.5 -186.65,180.5 ; 16.5,51.5 16.5,68.325 22.85,68.325 22.85,51.5
  lines w0.2: -190,-31 190,-31 190,32 -190,32 -190,-31